# EAGLE board ultrasonic_send (EAGLE 6.5.0)
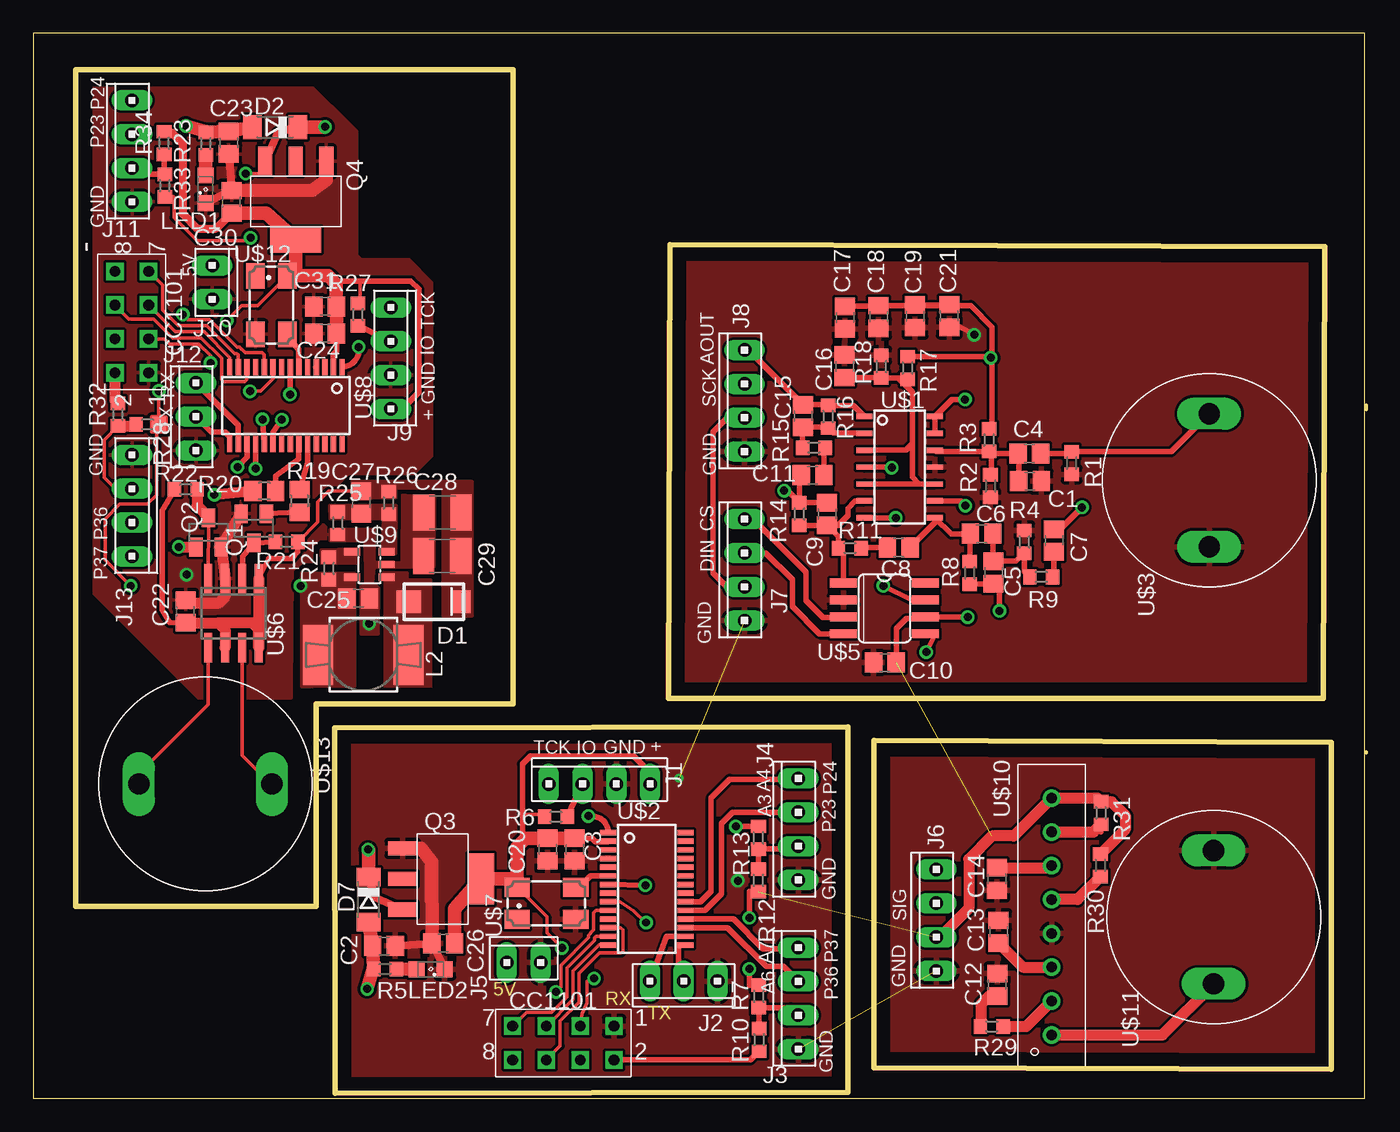
[diagram p0: board, top side]
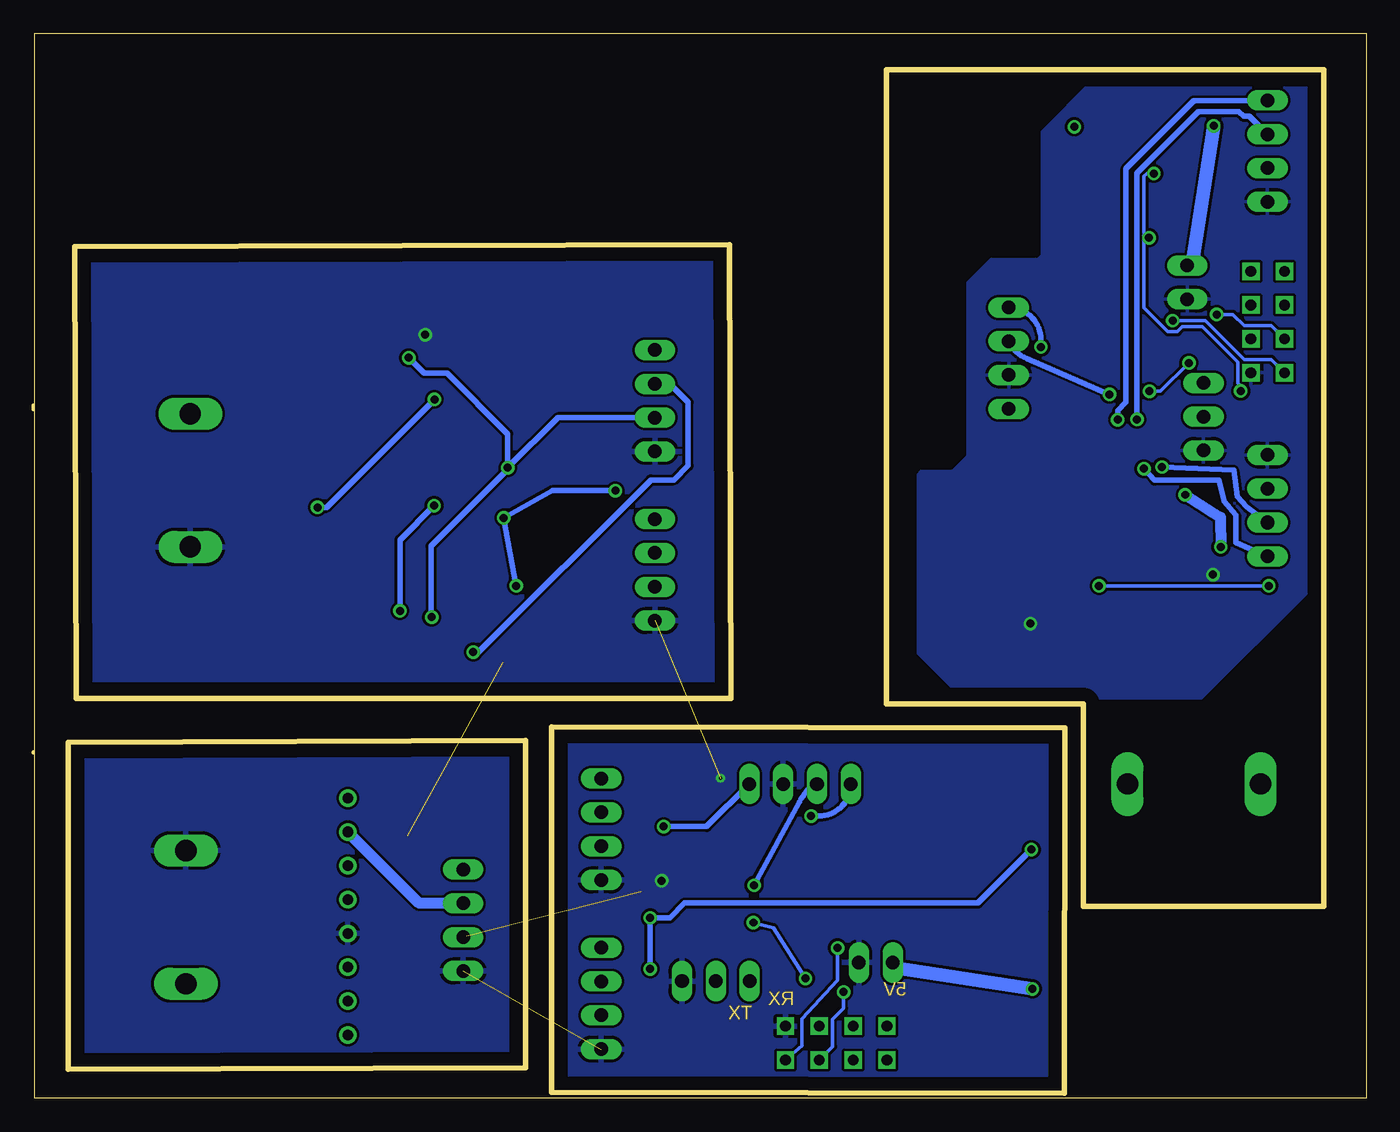
[diagram p1: board, bottom side, seen from below]

Size 100.1 x 80 mm. Coordinates in mm from the lower left corner, seen from the top.
Outline: 100.1,26.04 100.1,25.93
Outline: 100.1,51.74 100.1,52.07
Outline: 0,0 100,0 100,80 0,80 0,0
Outline: 22.63,27.81 61.16,27.89 61.19,0.48 22.66,0.41 22.63,27.81
Outline: 63.14,26.87 97.48,26.75 97.48,2.18 63.14,2.31 63.14,26.87
Outline: 47.83,64.14 97,63.98 96.88,30.05 47.7,30.05 47.83,64.14
Outline: 3.17,77.27 36.04,77.27 36.04,29.64 21.23,29.64 21.23,14.43 3.17,14.43 3.17,77.27
Copper layers (1*16): Top 0.035mm / dielectric 1.5mm / Bottom 0.035mm
Design rules "default *": minimum track width 10mil, minimum drill 10mil, track to track 8mil, track to pad 8mil, pad to pad 8mil, via to via 8mil, smd to smd 8mil, copper to edge 40mil, drill to drill 8mil, minimum pad ring 10mil, minimum via ring 8mil, stop-mask expansion 4mil, vias tented up to drill 20mil, thermal gap 10mil

## Footprints (pad centres in the part's own frame; a part is rotated, then mirrored left to right if it is on the bottom)
C0805 = smd 1.3 x 1.5: 1 -0.85,0; 2 0.85,0
C1210 = smd 1.6 x 2.7: 1 -1.4,0; 2 1.4,0
GF1 = smd 1.85 x 1.68: A 1.87,0 | smd 1.32 x 1.68: C -2.12,0
SOD80C = smd 1.4 x 1.8: A 1.7,0; C -1.7,0
10X04MTA = drill 1.016 long: 1 3.81,0; 2 1.27,0; 3 -1.27,0; 4 -3.81,0
10X03MTA = drill 1.016 long: 1 2.54,0; 2 0,0; 3 -2.54,0
10X02MTA = drill 1.016 long: 1 1.27,0; 2 -1.27,0
MS85 = smd 4.5 x 2.25: 1 0,-3.383; 2 0,3.383
SML0805 = smd 1.2 x 1.2: A 1.05,0; C -1.05,0
SOT23 = smd 1 x 1.4: 1 -0.95,-1.1; 2 0.95,-1.1; 3 0,1.1
SOT223-4 = smd 1.067 x 2.184: 1 -2.3,-3; 2 0,-3; 3 2.3,-3 | smd 3.81 x 1.93: 4 0,2.9
R0603 = smd 1 x 1.1: 1 -0.85,0; 2 0.85,0
R0805 = smd 1.3 x 1.5: 1 -0.85,0; 2 0.85,0
D_R-PDSO-G14 = smd 0.4 x 1.2: 1 -3.81,-2.65; 2 -2.54,-2.65; 3 -1.27,-2.65; 4 0,-2.65; 5 1.27,-2.65; 6 2.54,-2.65; 7 3.81,-2.65; 8 3.81,2.65; 9 2.54,2.65; 10 1.27,2.65; 11 0,2.65; 12 -1.27,2.65; 13 -2.54,2.65; 14 -3.81,2.65
PW_R-PDSO-G28 = smd 0.4 x 1.2: 1 -4.225,-2.9; 2 -3.575,-2.9; 3 -2.925,-2.9; 4 -2.275,-2.9; 5 -1.625,-2.9; 6 -0.975,-2.9; 7 -0.325,-2.9; 8 0.325,-2.9; 9 0.975,-2.9; 10 1.625,-2.9; 11 2.275,-2.9; 12 2.925,-2.9; 13 3.575,-2.9; 14 4.225,-2.9; 15 4.225,2.9; 16 3.575,2.9; 17 2.925,2.9; 18 2.275,2.9; 19 1.625,2.9; 20 0.975,2.9; 21 0.325,2.9; 22 -0.325,2.9; 23 -0.975,2.9; 24 -1.625,2.9; 25 -2.275,2.9; 26 -2.925,2.9; 27 -3.575,2.9; 28 -4.225,2.9
ULTRASONIC = drill 1.6 long: P$1 -5,0; P$2 5,0
CC1101 = drill 0.8 square: CSN -2.54,0; GDO0 -2.54,-2.54; GDO2 2.54,0; GND -5.08,-2.54; MISO/GDO1 2.54,-2.54; MOSI 0,0; SCK 0,-2.54; VCC -5.08,0
SO08 = smd 0.66 x 2.032: 1 -1.905,-3.073; 2 -0.635,-3.073; 3 0.635,-3.073; 4 1.905,-3.073; 5 1.905,3.073; 6 0.635,3.073; 7 -0.635,3.073; 8 -1.905,3.073
SO8 = smd 0.6 x 2.2: 1 -1.905,-2.6; 2 -0.635,-2.6; 3 0.635,-2.6; 4 1.905,-2.6; 5 1.905,2.6; 6 0.635,2.6; 7 -0.635,2.6; 8 -1.905,2.6
CTS406 = smd 1.9 x 1.4: 1 -2.2,-1.2; 2 2.2,-1.2; 3 2.2,1.2; 4 -2.2,1.2
SOT23-DBV = smd 0.55 x 1.2: 1 -0.95,-1.3; 2 0,-1.3; 3 0.95,-1.3; 4 0.95,1.3; 5 -0.95,1.3
CX20106 = drill 0.8: P$1 -10.16,0; P$2 -7.62,0; P$3 -5.08,0; P$4 -2.54,0; P$5 0,0; P$6 2.54,0; P$7 5.08,0; P$8 7.62,0

## Placement (x,y rotation side)
C1  0.1uF  [C0805]  74.85,46.35 0 top
C2  10uF  [C0805]  26.34,11.46 0 top
C3  0.1uF  [C0805]  40.67,18.69 270 top
C4  1uF  [C0805]  74.8,48.44 0 top
C5  150pF  [C0805]  72.11,39.5 90 top
C6  1500pF  [C0805]  71.22,42.42 0 top
C7  1uF  [C0805]  76.66,41.91 90 top
C8  1uF  [C0805]  65,41.38 180 top
C9  100pF  [C0805]  59.61,43.89 90 top
C10  0.1uF  [C0805]  63.96,32.74 0 top
C11  1uF  [C0805]  58.52,46.81 0 top
C12  1uF  [C0805]  72.39,8.53 90 top
C13  3.3uF  [C0805]  72.49,12.52 90 top
C14  330p  [C0805]  72.36,16.48 270 top
C15  100pF  [C0805]  57.81,51.26 90 top
C16  0.1uF  [C0805]  60.93,54.99 270 top
C17  1uF  [C0805]  60.96,58.65 90 top
C18  1uF  [C0805]  63.47,58.7 90 top
C19  0.1uF  [C0805]  66.22,58.75 90 top
C20  0.1uF  [C0805]  38.63,18.69 270 top
C21  1000pF  [C0805]  68.78,58.78 90 top
C22  0.1uF  [C0805]  11.43,36.58 90 top
C23  10uF  [C0805]  14.68,71.78 270 top
C24  0.1uF  [C0805]  21.92,57.45 180 top
C25  10uF  [C0805]  24.41,37.57 0 top
C26  10uF  [C0805]  30.78,11.66 180 top
C27  100pF  [C0805]  24.64,44.75 270 top
C28  10uF/50V  [C1210]  30.73,44.02 180 top
C29  10uF/50V  [C1210]  30.71,40.74 180 top
C30  10uF  [C0805]  14.88,67.34 90 top
C31  0.1uF  [C0805]  21.92,59.49 180 top
D1  B34B  [GF1]  30.07,37.31 180 top
D2  PMLL4150  [SOD80C]  18.16,72.95 180 top
D7  PMLL4150  [SOD80C]  25.17,14.94 270 top
J1  SBWD  [10X04MTA]  42.52,23.62 0 top
J2  UART  [10X03MTA]  48.84,8.81 180 top
J3  AD  [10X04MTA]  57.45,7.52 90 top
J4  function  [10X04MTA]  57.45,20.22 90 top
J5  pwr_5V  [10X02MTA]  36.83,10.21 0 top
J6  AD  [10X04MTA]  67.82,13.39 90 top
J7  AD  [10X04MTA]  53.42,39.7 90 top
J8  AD  [10X04MTA]  53.42,52.4 90 top
J9  SBWD  [10X04MTA]  26.85,55.6 270 top
J10  pwr_5V  [10X02MTA]  13.44,61.29 270 top
J11  function  [10X04MTA]  7.42,71.15 90 top
J12  UART  [10X03MTA]  12.22,51.21 90 top
J13  AD  [10X04MTA]  7.42,44.53 270 top
L2  33uH  [MS85]  24.79,33.32 90 top
LED1  RED  [SML0805]  12.93,68.28 90 top
LED2  RED  [SML0805]  29.84,9.7 180 top
Q1  MMBT3904  [SOT23]  16.56,42.82 180 top
Q2  MMBT3904  [SOT23]  13.16,42.52 0 top
Q3  AMS1117-3.3  [SOT223-4]  30.73,16.48 270 top
Q4  AMS1117-3.3  [SOT223-4]  19.71,67.39 180 top
R1  10K 1%  [R0603]  77.98,47.73 90 top
R2  200K 1%  [R0603]  71.88,46 90 top
R3  200K 1%  [R0603]  71.78,49.45 90 top
R4  8.66K 1%  [R0603]  74.42,41.81 90 top
R5  500R  [R0603]  26.42,9.73 180 top
R6  10K  [R0603]  39.24,21.16 180 top
R7  0  [R0603]  54.48,7.67 90 top
R8  82K 1%  [R0603]  70.33,39.47 90 top
R9  953R 1%  [R0603]  75.69,39.17 180 top
R10  0  [R0603]  54.51,4.39 270 top
R11  1K 1%  [R0603]  61.32,41.33 0 top
R12  0  [R0603]  54.46,16.38 270 top
R13  0  [R0603]  54.46,19.58 90 top
R14  NC  [R0603]  57.53,43.89 270 top
R15  10K 1%  [R0603]  58.62,48.87 0 top
R16  100K 1%  [R0603]  59.69,51.21 270 top
R17  100K 1%  [R0603]  65.66,54.86 270 top
R18  100K 1%  [R0603]  63.68,54.97 90 top
R19  2.2K  [R0805]  19.99,44.88 270 top
R20  2.2K  [R0805]  17.35,45.62 180 top
R21  20K  [R0603]  19.02,41.81 0 top
R22  20K  [R0603]  11.46,45.75 180 top
R23  500R  [R0603]  12.95,71.7 90 top
R24  10K  [R0603]  22.2,39.8 90 top
R25  13.3K 1%  [R0603]  22.89,43.21 270 top
R26  309K 1%  [R0603]  26.7,44.73 270 top
R27  10K  [R0603]  24.38,58.88 90 top
R28  0  [R0603]  8.59,50.62 0 top
R29  4.7K  [R0603]  71.98,5.41 0 top
R30  200K  [R0603]  80.14,17.5 270 top
R31  10K  [R0603]  80.19,21.44 270 top
R32  0  [R0603]  6.35,51.36 90 top
R33  0  [R0603]  9.88,68.55 270 top
R34  0  [R0603]  9.83,71.75 90 top
U$1  OPA1654PW  [D_R-PDSO-G14]  65.07,47.42 270 top
U$2  MSP430F2112  [PW_R-PDSO-G28]  46.08,15.75 270 top
U$3  U_RX  [ULTRASONIC]  88.32,46.43 90 top
U$4  CC1101  [CC1101]  38.53,2.9 180 top
U$5  MAX5401EKA-T  [SO08]  63.93,36.8 270 top
U$6  IXDD604SIA  [SO8]  15.04,36.45 180 top
U$7  CRISTAL  [CTS406]  38.53,14.66 0 top
U$8  MSP430F2112  [PW_R-PDSO-G28]  18.97,52.04 180 top
U$9  LM2733XMF  [SOT23-DBV]  25.25,40.11 90 top
U$10  CX20106  [CX20106]  76.48,14.94 90 top
U$11  U_RX  [ULTRASONIC]  88.65,13.61 90 top
U$12  CRISTAL  [CTS406]  17.88,59.59 270 top
U$13  U_TX  [ULTRASONIC]  12.93,23.62 0 top
U$14  CC1101  [CC1101]  6.12,59.59 90 top

## Library data of the parts
C1-C31 R1-R34 = resistor
D1 D2 D7 = diode
J1-J13 = con-amp
L2 = inductor-neosid; OC_FARNELL: unknown; OC_NEWARK: unknown
LED1 LED2 = led
Q1 Q2 U$1-U$14 = tofu
Q3 Q4 = ti-parts

## Nets
+3V1: C24.1 C30.1 C31.1 J9.1 Q4.4 R27.2 R32.2 R34.2 U$8.2 U$12.4 U$14.VCC
+3V3: C3.1 C20.1 C26.1 J1.1 Q3.4 R6.2 R10.2 R13.2 U$2.2 U$4.VCC U$7.4
+5V: C2.1 D7.A J5.2 R5.2
+5V1: C23.1 D2.A J10.2 R23.2
AMP_OUT: C15.2 J8.1 R16.1 U$1.1
GND: C1.2 C2.2 C3.2 C10.1 C12.2 C13.2 C14.2 C16.1 C17.1 C18.1 C19.1 C20.2 C21.1 C26.2 J1.2 J2.3 J3.4 J4.4 J5.1 J6.4 J7.4 J8.4 LED2.C Q3.1 R1.1 R2.1 R4.2 R18.2 U$1.11 U$2.4 U$3.P$1 U$4.GND U$5.2 U$7.2 U$10.P$4 U$11.P$2
GND1: C22.2 C23.2 C24.2 C25.2 C28.2 C29.2 C30.2 C31.2 J9.2 J10.1 J11.4 J12.3 J13.4 LED1.C Q1.2 Q2.2 Q4.1 R25.2 U$6.3 U$8.4 U$9.2 U$12.2 U$14.GND
N$1: C4.2 R1.2 U$3.P$2
N$2: C5.1 R8.1 U$1.9
N$3: C1.1 C4.1 R2.2 R3.1 U$1.12
N$4: C6.1 C8.1 R8.2 U$1.8
N$5: J1.4 U$2.1
N$6: LED2.A R5.1
N$7: U$2.6 U$7.3
N$8: C5.2 C6.2 R4.1 R9.2
N$9: J4.3 R12.1 R13.1
N$10: J1.3 R6.1 U$2.7
N$11: U$2.9 U$4.GDO0
N$12: U$2.10 U$4.CSN
N$13: U$2.12 U$4.MOSI
N$14: U$2.13 U$4.MISO/GDO1
N$15: U$2.14 U$4.SCK
N$16: J2.1 U$2.16
N$17: J2.2 U$2.15
N$18: J3.1 U$2.18
N$19: J3.2 U$2.17
N$20: J3.3 R7.1 R10.1
N$21: C7.1 R9.1
N$22: C7.2 U$1.13 U$1.14
N$23: C9.1 R11.1 R14.2 U$1.6 U$5.1
N$24: C9.2 C11.1 R14.1 U$1.7 U$5.7
N$25: C8.2 R11.2
N$26: C11.2 R15.2
N$27: C15.1 R15.1 R16.2 U$1.2
N$28: Q1.1 R19.2
N$29: Q2.1 R20.2
N$30: Q1.3 R21.1 U$6.2
N$31: Q2.3 R22.1 U$6.4
N$32: J9.4 U$8.1
N$33: J9.3 R27.1 U$8.7
N$34: LED1.A R23.1
N$35: J11.3 R33.1 R34.1
N$36: R24.2 U$9.4
N$37: U$8.6 U$12.3
N$38: D1.A L2.1 U$9.1
N$39: C27.2 R25.1 R26.2 U$9.3
N$40: C22.1 C27.1 C28.1 C29.1 D1.C R21.2 R22.2 R26.1 U$6.1 U$6.6 U$6.8
N$41: J11.1 U$8.20
N$42: J4.1 U$2.20
N$43: J11.2 U$8.19
N$44: U$8.10 U$14.CSN
N$45: U$8.12 U$14.MOSI
N$46: U$8.13 U$14.MISO/GDO1
N$47: R29.2 U$10.P$2
N$48: C12.1 R29.1
N$49: U$10.P$1 U$11.P$1
N$50: C13.1 U$10.P$3
N$51: J6.2 R31.2 U$10.P$7
N$52: R30.2 U$10.P$5
N$53: C14.1 U$10.P$6
N$54: U$6.7 U$13.P$2
N$55: U$6.5 U$13.P$1
N$56: J4.2 U$2.19
N$57: J12.1 U$8.16
N$58: J12.2 U$8.15
N$59: J13.1 U$8.18
N$60: J13.2 U$8.17
N$61: U$8.14 U$14.SCK
N$62: U$8.9 U$14.GDO0
N$63: J13.3 R28.1 R32.1
OUT: Q3.2
OUT1: Q4.2
SPI_CS: J7.1 U$5.3
SPI_DATA: J7.2 U$5.4
SPI_SCLK: J8.2 U$5.5
US_TXA: R19.1 U$8.24
US_TXB: R20.1 U$8.23
VCC: C10.2 C17.2 C18.2 C19.2 C21.2 D7.C J6.3 J7.3 J8.3 Q3.3 R3.2 R7.2 R12.2 R17.1 R30.1 R31.1 U$1.4 U$5.6 U$10.P$8
VCC1: C25.1 D2.C L2.2 Q4.3 R24.1 R28.2 R33.2 U$9.5
VREF: C16.2 R17.2 R18.1 U$1.3 U$1.5 U$1.10

## Tracks (layer width: path | path; a pad name or v marks a point on that pad's centre or on a via)
+3V1  (via drill 0.6)
  Top 0.254: v14.53,58.42 15.65,59.54 16.87,59.54 18.75,61.42 U$12.4 | 24.56,61.39 24.56,60.07 R27.2
  Top 0.406: C24.1 22.77,56.15 22.5,55.88 22.5,54.99 U$8.2 | J9.1 27.71,51.79 28.96,53.03 28.96,60.78 28.35,61.39 24.56,61.39 22.99,61.39 22.76,61.16
  Top 0.61: R34.2 10.3,72.61 11.2,71.7 11.2,66.45 12.32,65.33 13.73,65.33 C30.1
  Top 0.813: U$14.VCC 6.12,52.44 R32.2
  Top 1.016: C30.1 17.48,66.5 Q4.4 19.71,62.42 U$12.4 22.13,61.79 22.76,61.16 22.76,59.5 C31.1 C24.1
  Bottom 0.254: v14.53,58.42 12.09,58.42 9.17,55.5 7.11,55.5 U$14.VCC
+3V3  (via drill 0.6)
  Top 0.254: v39.7,11.3 38.58,12.42 38.58,13.64 36.7,15.52 U$7.4 | 36.73,21.34 38.05,21.34 R6.2
  Top 0.406: C3.1 41.97,19.54 42.24,19.28 43.13,19.28 U$2.2 | J1.1 46.33,24.49 45.09,25.73 37.34,25.73 36.73,25.12 36.73,21.34 36.73,19.76 36.96,19.53 | v52.76,20.42 R13.2 | U$4.VCC 53.86,2.9 R10.2
  Top 1.016: C26.1 31.62,14.25 Q3.4 35.7,16.48 U$7.4 36.33,18.91 36.96,19.53 C20.1 C3.1
  Bottom 0.254: v39.7,11.3 39.7,8.87 42.37,5.99 42.37,3.94 U$4.VCC
  Bottom 0.406: v52.76,20.42 49.53,20.42 J1.1
+5V  (via drill 0.6)
  Top 1.016: D7.A C2.1 R5.2 25.52,9.78 v25.07,8.23
  Bottom 1.016: v25.07,8.23 35.13,9.78 J5.2
+5V1  (via drill 0.6)
  Top 1.016: D2.A C23.1 R23.2 13.01,72.61 v11.46,73.05
  Bottom 1.016: v11.46,73.05 13.01,62.99 J10.2
AMP_OUT
  Top 0.406: U$1.1 61.6,52.06 R16.1 59.64,52.11 C15.2 53.71,56.21 J8.1
GND  (via drill 0.25, 0.6)  (2 unrouted)
  Top 0.406: 72.36,13.5 C13.2 | C21.1 69.58,57.93 v70.66,57.35
  Top 0.61: C2.2 C26.2 LED2.C
  Top 0.813: C12.2 72.2,9.58
  Top 1.016: Q3.1 29.13,18.77 29.92,17.75 C26.2
  other vias: 48.49,24.05 52.91,16.36
  pour Top: 47.83,64.14 97,64.14 97.16,30.02 47.98,30.02
  pour Bottom: 47.8,64.14 97,64.14 97.05,30.05 47.85,30.05
  pour Top: 63.09,26.72 97.49,26.7 97.49,2.16 63.09,2.18
  pour Bottom: 63.12,26.7 97.49,26.7 97.49,2.16 63.12,2.16
  pour Bottom: 22.61,27.79 61.16,27.89 61.19,0.48 22.63,0.38
  pour Top: 22.63,27.79 61.16,27.91 61.14,0.48 22.61,0.36
GND1  (via drill 0.6)
  Top 0.61: C23.2 C30.2 LED1.C
  Top 0.813: C22.2 11.67,37.19 13.92,37.19 14.4,37.67 U$6.3 Q2.2 Q1.2
  Top 1.016: Q4.1 22,68.99 20.98,68.2 C30.2
  other vias: 11.51,39.34 25.22,35.66
  pour Top (no thermals): 24.61,34.9 25.91,34.9 25.91,36.8 25.93,36.8 25.93,38.35 25.73,38.53 25.5,38.71 25.58,39.9 30.07,39.9 30.07,39.98 30.1,39.98 30.12,45.24 28.3,45.29 28.37,45.24 27.74,45.31 27.69,40.23 25.58,40.28 25.6,40.51 25.58,40.51 25.58,42.72 22.28,42.72 22.28,41.91 24.92,41.91 24.94,38.68 24.64,38.46 24.64,38.4 24.61,38.4
  pour Bottom: 4.37,76.45 4.37,38.07 12.37,30.07 30.28,30.07 33.63,33.43 33.63,46.86 33.43,47.07 31.19,47.07 31.17,47.09 31.06,47.09 29.9,48.26 29.9,61.26 28.17,62.99 24.66,62.99 24.33,63.32 24.33,72.62 20.47,76.48 4.39,76.48
  pour Top: 4.34,76.43 4.34,38.13 12.37,30.1 19.38,30.1 19.38,30.43 19.46,39.65 20.29,40.31 20.9,40.28 20.95,41.53 21.49,42.06 22.91,41.94 24.89,41.91 24.89,42.75 22.15,42.75 21.67,43.23 21.67,44.91 23.7,46.94 28.6,46.94 29.92,48.26 29.92,61.29 28.22,62.99 24.64,62.99 24.28,63.35 24.28,72.64 20.4,76.53 4.45,76.53
N$1
  Top 0.406: C4.2 77.84,48.44 R1.2 85.46,48.58 U$3.P$2
N$2  (via drill 0.6)
  Top 0.406: R8.1 72.08,38.62 C5.1 72.57,38.19 v72.57,36.63 | v70,44.53 69.65,44.88 U$1.9
  Bottom 0.406: v72.57,36.63 72.57,41.96 v70,44.53
N$3
  Top 0.406: C1.1 74,48.39 C4.1 71.95,48.44 | 71.95,48.44 R3.1 67.81,48.6 U$1.12 | 71.95,48.44 71.95,46.91 R2.2
N$4
  Top 0.406: R8.2 70.33,42.38 | 70.33,42.38 C6.1 | 70.33,42.38 68.96,42.38 U$1.8 67.72,43.25 C8.1
N$5  (via drill 0.6)
  Top 0.406: v41.68,21.21 41.94,21.21 arc-90 U$2.1
  Bottom 0.406: v41.68,21.21 41.12,21.21 arc-90 J1.4
N$6
  Top 1.016: R5.1 LED2.A
N$7
  Top 0.406: U$7.3 40.98,15.86 41.83,16.71 43.17,16.71 U$2.6
N$8
  Top 0.406: C6.2 72.07,40.39 C5.2 73.81,40.35 R4.1 74.42,39.59 R9.2
N$9
  Top 0.406: R12.1 R13.1 57.24,18.73 J4.3
N$10  (via drill 0.6)
  Top 0.406: R6.1 J1.3 | v45.97,16 U$2.7
  Bottom 0.406: v45.97,16 42.55,22.28 arc41 J1.3
N$11  (via drill 0.6)
  Top 0.254: v46.02,13.21 45.06,14.07 44.07,14.78 43.18,14.78 U$2.9 | v42.11,9.02 41.58,8.79 41.58,7.19 41.22,6.38 U$4.GDO0
  Bottom 0.254: v46.02,13.21 44.5,12.83 v42.11,9.02
N$12  (via drill 0.6)
  Top 0.254: v39.24,8 39.62,8.38 39.62,10.01 41.71,12.09 41.71,12.27 41.83,12.39 41.83,12.42 42.09,12.68 42.09,13.95 42.27,14.12 43.16,14.12 U$2.10
  Bottom 0.254: v39.24,8 39.24,6.78 40.08,5.94 40.08,3.89 U$4.CSN
N$13
  Top 0.254: U$2.12 43.87,12.83 43.89,12.8 44.12,12.8 44.27,12.65 44.27,11.05 44.15,10.92 42.52,10.92 41,9.4 41,7.24 39.57,5.82 39.57,3.94 U$4.MOSI
N$14
  Top 0.254: U$4.MISO/GDO1 37.03,6.48 38.91,6.48 40.08,7.64 40.08,9.8 42.16,11.89 42.16,12.06 42.27,12.17 43.16,12.17 U$2.13
N$15
  Top 0.254: U$2.14 43.16,11.53 42.47,11.53 40.54,9.6 40.54,7.44 U$4.SCK
N$16
  Top 0.406: U$2.16 47.55,12.17 J2.1
N$17
  Top 0.406: U$2.15 48.4,11.52 48.46,11.05 48.46,10.01 J2.2
N$18
  Top 0.406: U$2.18 52.57,13.47 54.79,11.25 57.38,11.25 J3.1
N$19
  Top 0.406: U$2.17 52.15,12.82 55.07,9.91 56.34,9.91 J3.2
N$20
  Top 0.406: J3.3 56.88,6.82 R7.1 54.48,5.27 R10.1
N$21
  Top 0.406: C7.1 76.66,39.28 R9.1
N$22  (via drill 0.6)
  Top 0.406: C7.2 77.13,42.76 v78.77,44.4 | v69.98,52.5 69,52.5 U$1.14 U$1.13
  Bottom 0.406: v78.77,44.4 78.08,44.4 v69.98,52.5
N$23
  Top 0.406: C9.1 60.47,42.19 R11.1 60.86,40.93 U$5.1 | C9.1 60.44,43.04 61.16,43.76 61.16,44.32 61.72,44.88 U$1.6 | R14.2 C9.1
N$24  (via drill 0.6)
  Top 0.406: R14.1 C9.2 | R14.1 57.53,46.67 C11.1 | U$5.7 65.99,37.44 v63.83,38.51 | U$1.7 v64.77,43.61 | v56.39,45.64 56.63,45.64 R14.1
  Bottom 0.406: v63.83,38.51 v64.77,43.61 61.09,45.64 v56.39,45.64
N$25
  Top 0.406: C8.2 62.22,41.38 R11.2
N$26
  Top 0.406: C11.2 59.37,48.77 R15.2
N$27
  Top 0.406: U$1.2 60.09,49.96 R16.2 59.64,50.41 C15.1 57.77,50.37 R15.1
N$28
  Top 0.406: R19.2 Q1.1
N$29  (via drill 0.6)
  Top 0.813: R20.2 v13.59,45.34 | v10.92,41.43 Q2.1
  Bottom 0.813: v13.59,45.34 10.95,43.64 v10.92,41.43
N$30
  Top 0.406: R21.1 Q1.3 15.72,40.69 U$6.2
N$31
  Top 0.254: Q2.3 U$6.4
  Top 0.813: R22.1 12.29,44.53 Q2.3
N$32  (via drill 0.6)
  Top 0.406: v24.43,56.44 24.43,56.18 arc-90 U$8.1
  Bottom 0.406: v24.43,56.44 24.43,57 arc-90 J9.4
N$33  (via drill 0.6)
  Top 0.406: R27.1 J9.3 | v19.28,52.88 U$8.7
  Bottom 0.406: v19.28,52.88 25.5,55.58 arc41 J9.3
N$34
  Top 1.016: R23.1 LED1.A
N$35
  Top 0.406: R34.1 9.83,69.45 R33.1 7.89,69.41 J11.3
N$36
  pour Top (no thermals): 24.38,40.23 21.64,40.18 21.62,41.2 24.1,41.27 24.38,41.27
N$37
  Top 0.406: U$12.3 19.08,57.14 19.94,56.29 19.94,54.95 U$8.6
N$38
  pour Top (no thermals): 26.29,39.42 26.42,39.42 26.42,30.68 29.84,30.68 29.84,38.94 28.07,38.94 28.07,39.45 26.29,39.45
N$39
  pour Top (no thermals): 27.2,40.92 26.39,40.89 26.21,40.92 26.21,41.3 26.31,43.56 22.28,43.54 22.25,44.53 27.25,44.53
N$40
  Top 0.254: C27.1 22.19,45.6 21.36,44.78 21.36,43.3 R21.2
  Top 0.406: R22.2 9.68,44.15 9.68,36.7 10.26,35.74 C22.1 | R21.2 19.86,41.05 19.41,40.56 17.68,40.54 U$6.1
  Top 0.813: C22.1 13.91,35.73 13.92,35.71 | 13.92,35.71 14.4,35.23 U$6.6 | U$6.1 U$6.8 16.94,35.26 16.48,35.71 13.92,35.71
  pour Top (no thermals): 32.94,36.22 30.76,36.22 30.76,45.85 27.2,45.85 27.2,45.14 23.95,45.14 23.95,46.33 32.94,46.33
N$41  (via drill 0.6)
  Top 0.406: U$8.20 18.01,50.06 v18.67,50.98
  Bottom 0.406: v18.67,50.98 18.67,51.66 18.03,52.3 18.03,69.85 12.95,74.93 7.44,74.93 J11.1
N$42
  Top 0.406: U$2.20 50.1,14.77 50.9,15.57 50.9,22.58 52.3,23.98 57.4,23.98 J4.1
N$43  (via drill 0.6)
  Top 0.406: U$8.19 v17.22,51
  Bottom 0.406: v17.22,51 17.22,69.49 12.6,74.12 9.55,74.12 9.2,73.76 8.76,73.76 J11.2
N$44  (via drill 0.6)
  Top 0.254: v11.23,58.88 11.61,58.5 13.23,58.5 15.32,56.41 15.49,56.41 15.62,56.29 15.65,56.29 15.9,56.03 17.17,56.03 17.35,55.85 17.35,54.97 U$8.10
  Bottom 0.254: v11.23,58.88 10.01,58.88 9.17,58.04 7.11,58.04 U$14.CSN
N$45
  Top 0.254: U$8.12 16.05,54.25 16.03,54.23 16.03,54 15.88,53.85 14.28,53.85 14.15,53.98 14.15,55.6 12.62,57.12 10.46,57.12 9.04,58.55 7.16,58.55 U$14.MOSI
N$46
  Top 0.254: U$14.MISO/GDO1 9.7,61.09 9.7,59.21 10.87,58.04 13.03,58.04 15.11,55.96 15.29,55.96 15.39,55.85 15.39,54.97 U$8.13
N$47
  Top 0.813: R29.2 74.57,5.41 U$10.P$2
N$48
  Top 0.813: C12.1 71.77,7.68 71.17,7.09 71.17,5.45 R29.1
N$49
  Top 0.813: U$10.P$1 84.81,4.78 U$11.P$1
N$50
  Top 0.813: C13.1 74.31,9.86 U$10.P$3
N$51
  Top 0.406: 80.19,20.02 R31.2
  Top 0.813: U$10.P$7 79.61,20.02 R31.2
  Bottom 0.813: J6.2 71.12,14.66 U$10.P$7
N$52
  Top 0.813: R30.2 78.42,14.94 U$10.P$5
N$53
  Top 0.813: C14.1 76.34,17.34 U$10.P$6
N$54
  Top 0.254: U$6.7 15.67,25.78 16.94,24.51 U$13.P$2
N$55
  Top 0.254: U$6.5 13.13,29.59 8.05,24.51 U$13.P$1
N$56
  Top 0.406: U$2.19 50.45,14.12 51.69,15.37 51.69,20.65 52.53,21.49 J4.2
N$57
  Top 0.406: U$8.16 15.4,50.56 J12.1
N$58
  Top 0.406: U$8.15 14.75,49.72 14.4,50.06 13.36,50.06 J12.2
N$59  (via drill 0.6)
  Top 0.406: U$8.18 16.69,48.01 v16.69,47.3
  Bottom 0.406: J13.1 9.78,41.76 9.8,43.81 10.67,44.83 11.07,46.43 15.9,46.43 v16.69,47.3
N$60  (via drill 0.6)
  Top 0.406: U$8.17 16.05,48.16 v15.34,47.42
  Bottom 0.406: v15.34,47.42 9.96,47.19 9.68,45.21 8.97,44.42 J13.2
N$61
  Top 0.254: U$8.14 14.76,54.97 14.76,55.65 12.83,57.58 10.67,57.58 U$14.SCK
N$62  (via drill 0.6)
  Top 0.254: v16.28,53.11 17.07,53.11 18.01,54.05 U$8.9 | v13.31,55.24 13.31,55.78 12.42,56.67 10.26,56.67 9.88,57.05 U$14.GDO0
  Bottom 0.254: v16.28,53.11 15.44,53.11 v13.31,55.24
N$63
  Top 0.254: J13.3 6.15,45.8 5.31,46.63 5.31,49.47 R32.1
  Top 0.813: R32.1 7.62,50.51 R28.1
SPI_CS
  Top 0.406: J7.1 54.05,43.51 58.04,39.52 58.04,37.39 59.31,36.12 60.81,36.12 U$5.3
SPI_DATA
  Top 0.406: J7.2 54.99,40.97 57,38.96 57,36.96 59.05,34.9 U$5.4
SPI_SCLK  (via drill 0.6)
  Top 0.406: U$5.5 67.74,34.9 v67.06,33.53
  Bottom 0.406: 53.49,53.59 J8.2 53.21,53.47 52.09,53.47 50.93,52.3 50.93,47.52 51.99,46.46 53.72,46.46 66.8,33.38 v67.06,33.53
US_TXA
  Top 0.406: U$8.24 20.6,47.76 R19.1
US_TXB
  Top 0.406: U$8.23 19.94,48.03 18.21,46.74 R20.1
VCC  (via drill 0.6)  (2 unrouted)
  Top 0.254: 67.56,12.19 J6.3 | 54.08,13.74 v53.77,13.56
  Top 0.406: C17.2 63.42,59.5 C18.2 66.17,59.55 | 66.17,59.55 C19.2 68.76,59.6 C21.2 | 66.17,59.55 70.4,59.55 72.01,57.94 72.01,55.4 | 72.01,55.4 72.01,55.12 | 72.01,55.12 72.01,50.53 R3.2 | R17.1 71.69,55.71 72.01,55.4 | v70.18,36.14 70.16,36.17 U$5.6 66.88,36.04 65.56,36.04 64.81,35.29 C10.2 | v71.91,55.63 71.91,55.22 72.01,55.12 | J7.3 52.09,38.43 51.05,39.47 51.05,50.04 52.15,51.13 J8.3 | v53.77,13.56 53.77,15.52 53.8,15.54 54.46,15.54 R12.2 | v53.77,9.73 53.77,8.53 53.8,8.51 R7.2 | U$1.4 64.41,47.42 v64.47,47.37
  Top 0.61: D7.C 25.58,15.14 Q3.3
  Top 0.813: R30.1 82.04,20.26 82.04,21.21 80.96,22.29 R31.1 79.92,22.55 U$10.P$8 73.64,19.71 72.01,19.71 70.26,17.96 70.26,14.28 68.1,12.12 J6.3
  Top 1.016: D7.C 25.17,18.67 v25.15,18.69
  Bottom 0.406: v64.47,47.37 64.47,47.24 70.23,41.48 70.23,36.2 v70.18,36.14 | v64.47,47.37 64.47,49.91 69.04,54.48 70.76,54.48 v71.91,55.63 | J8.3 60.71,51.13 v64.47,47.37 | v53.77,9.73 v53.77,13.56 52.3,13.56 51.18,14.68 29.16,14.68 v25.15,18.69
VCC1  (via drill 0.6)
  Top 0.254: R33.2 9.88,67.72 10.54,67.72 10.57,67.69 10.57,66.17 12.32,64.41 16.54,64.41 v16.31,64.64 | v15.95,69.47 17.17,69.47 17.4,69.7 17.4,70.08 Q4.3 | R28.2 9.42,50.62 9.42,51.26 9.45,51.28 9.53,51.28 9.53,51.18 9.98,51.18 9.98,50.04 9.27,50.04 | 9.27,50.04 8.89,50.04 8.89,51.21 9.42,51.21 v9.42,53.14 | v7.32,38.51 5.38,40.44 5.38,43.54 6.48,44.63 8.56,44.63 9.27,45.34 9.27,50.04 | v20.07,38.51 20.17,38.51
  Top 0.61: D2.C 18.36,72.54 Q4.3
  Top 1.016: D2.C 21.89,72.95 v21.92,72.97
  Bottom 0.254: v15.95,69.47 16.48,69.47 16.69,69.27 16.69,65.02 v16.31,64.64 16.69,64.85 16.69,59.38 14.88,57.58 14.17,57.58 13.79,57.96 12.29,57.96 9.65,55.32 9.65,53.72 9.42,53.49 v9.42,53.14 | v20.07,38.51 v7.32,38.51
  pour Top (no thermals): 20.17,30.96 20.17,39.45 24.13,39.42 24.13,30.96
VREF
  Top 0.406: C16.2 60.95,54.14 60.96,54.13 63.67,54.13 R18.1 | R18.1 65.56,54.12 R17.2 | R18.1 64.96,54.12 66.02,53.06 66.02,49.17 | 66.02,49.17 66.02,46.66 66.52,46.15 | 66.52,46.15 U$1.10 | U$1.3 65.53,48.69 66.02,49.17 | U$1.5 66.52,46.15

## Text on the board
Dimension: 5V | RX | TX
tNames: P24 | P23 | GND | - | 5V | TCK | IO | RX | GND | AOUT | TX | + | SCK | GND | GND | P36 | CS | P37 | DIN | GND | + | TCK | IO | GND | A4 | P24 | A3 | P23 | GND | SIG | A7 | P37 | A6 | GND | P36 | GND
_tNames: D7 | L2 | Q3 | D1 | C5 | J1 | R8 | U$3 | C7 | C3 | U$2 | C2 | C26 | R9 | R26 | U$7 | C4 | R5 | LED2 | C6 | R11 | R25 | C1 | C20 | Q1 | R24 | R1 | R3 | U$1 | J5 | R23 | LED4 | R21 | C15 | Q2 | J4 | R22 | R28 | R2 | R27 | C17 | R4 | U$12
_bNames: U$9